# EAGLE board rpiSensors (EAGLE 6.2)
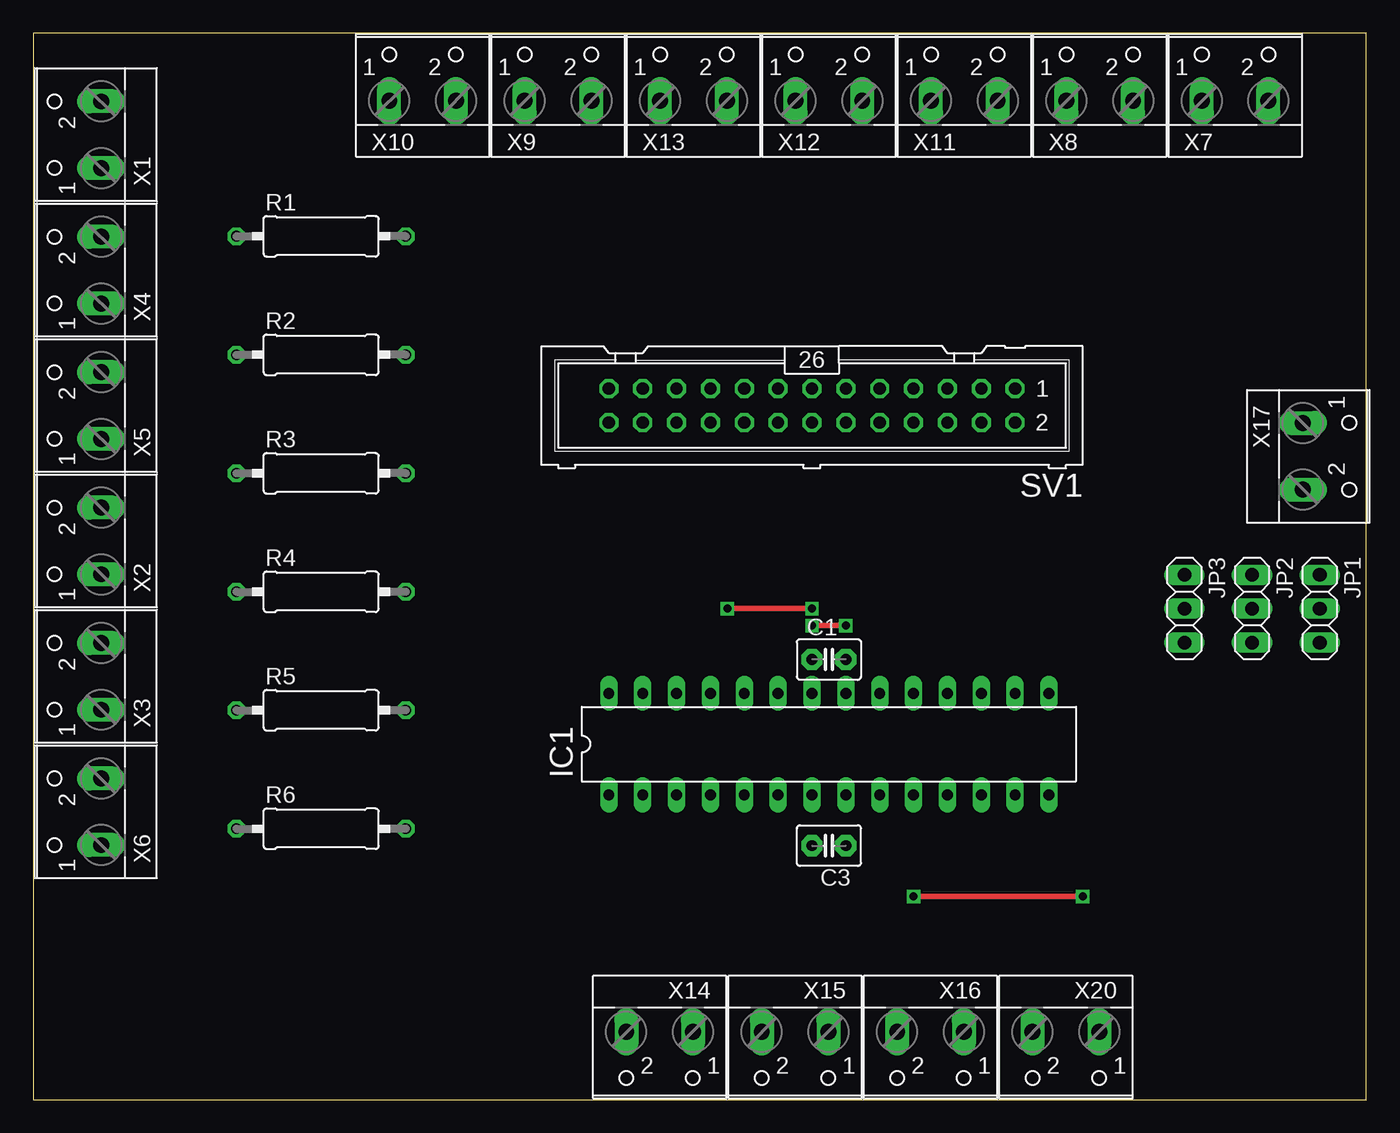
[diagram p0: board, top side]
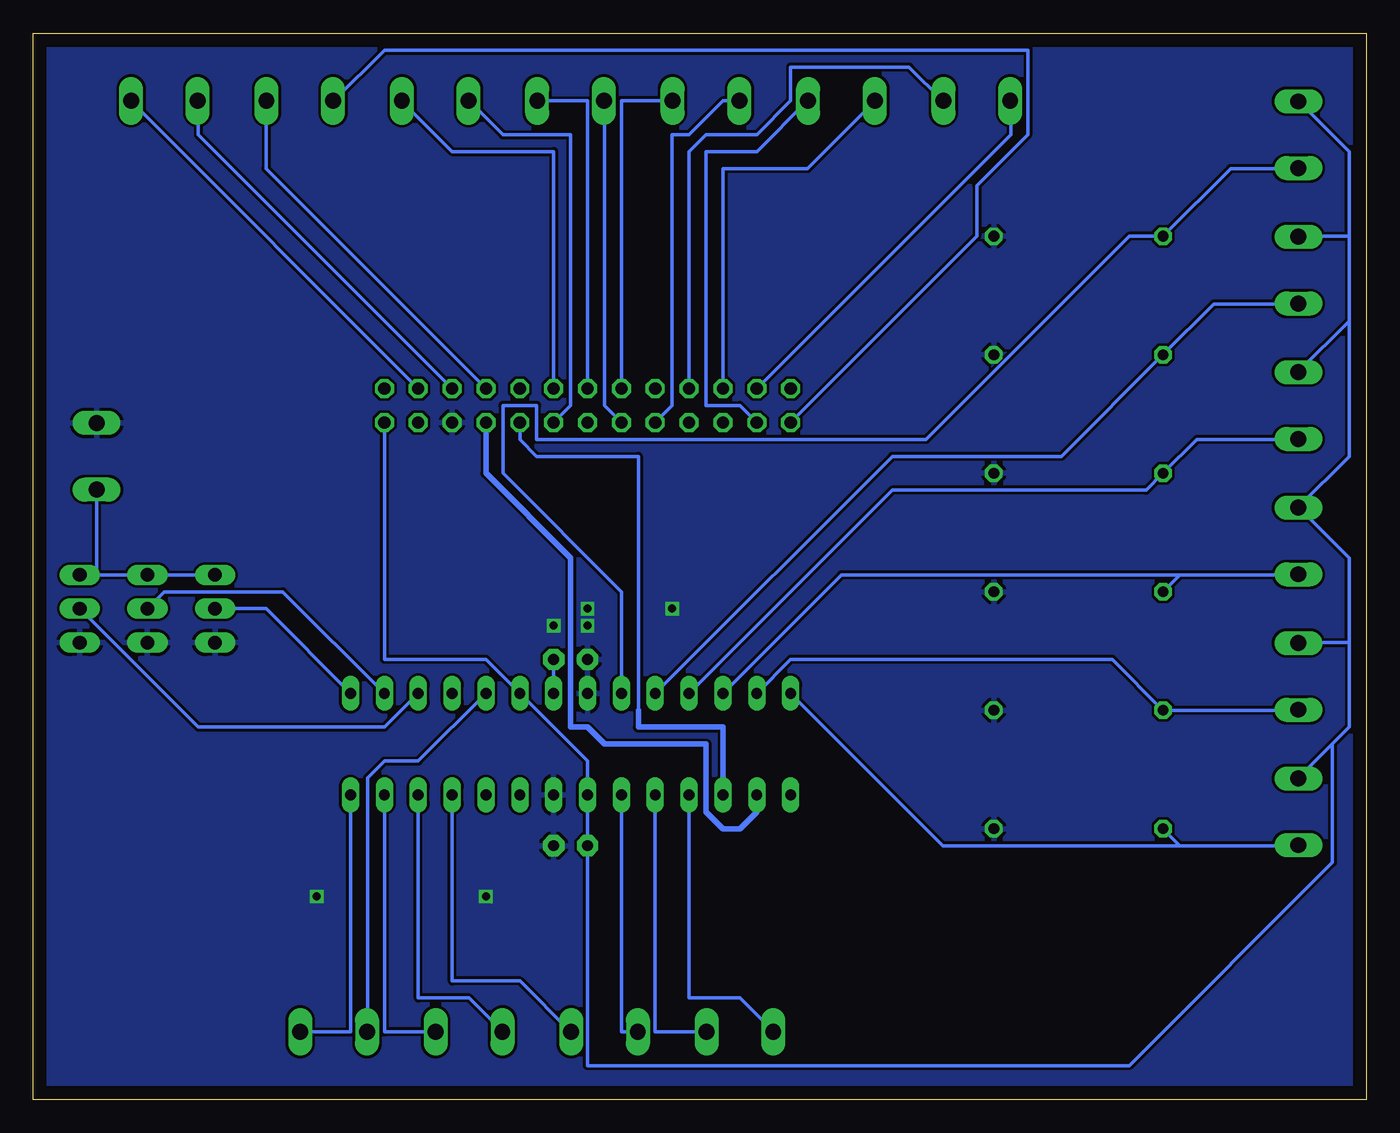
[diagram p1: board, bottom side, seen from below]

Size 100 x 80 mm. Coordinates in mm from the lower left corner, seen from the top.
Outline: 0,0 100,0 100,80 0,80 0,0
Copper layers (1*16): Top 0.035mm / dielectric 1.5mm / Bottom 0.035mm
Design rules: minimum track width 10mil, minimum drill 24mil, track to track 8mil, track to pad 8mil, pad to pad 8mil, via to via 8mil, smd to smd 8mil, copper to edge 40mil, drill to drill 8mil, minimum pad ring 10mil, minimum via ring 8mil, stop-mask expansion 4mil, vias tented up to drill 0mil, thermal gap 10mil

## Footprints (pad centres in the part's own frame; a part is rotated, then mirrored left to right if it is on the bottom)
C2.5-3 = drill 0.813 pad 1.6 octagon: 1 -1.27,0; 2 1.27,0
DIL28-3 = drill 0.813 long: 1 -16.51,-3.81; 2 -13.97,-3.81; 3 -11.43,-3.81; 4 -8.89,-3.81; 5 -6.35,-3.81; 6 -3.81,-3.81; 7 -1.27,-3.81; 8 1.27,-3.81; 9 3.81,-3.81; 10 6.35,-3.81; 11 8.89,-3.81; 12 11.43,-3.81; 13 13.97,-3.81; 14 16.51,-3.81; 15 16.51,3.81; 16 13.97,3.81; 17 11.43,3.81; 18 8.89,3.81; 19 6.35,3.81; 20 3.81,3.81; 21 1.27,3.81; 22 -1.27,3.81; 23 -3.81,3.81; 24 -6.35,3.81; 25 -8.89,3.81; 26 -11.43,3.81; 27 -13.97,3.81; 28 -16.51,3.81
1X03 = drill 1.016 long: 1 -2.54,0; 2 0,0; 3 2.54,0
0309/12 = drill 0.813 octagon: 1 -6.35,0; 2 6.35,0
ML26 = drill 0.914 octagon: 1 -15.24,-1.27; 2 -15.24,1.27; 3 -12.7,-1.27; 4 -12.7,1.27; 5 -10.16,-1.27; 6 -10.16,1.27; 7 -7.62,-1.27; 8 -7.62,1.27; 9 -5.08,-1.27; 10 -5.08,1.27; 11 -2.54,-1.27; 12 -2.54,1.27; 13 0,-1.27; 14 0,1.27; 15 2.54,-1.27; 16 2.54,1.27; 17 5.08,-1.27; 18 5.08,1.27; 19 7.62,-1.27; 20 7.62,1.27; 21 10.16,-1.27; 22 10.16,1.27; 23 12.7,-1.27; 24 12.7,1.27; 25 15.24,-1.27; 26 15.24,1.27
W237-102 = drill 1.194 long: 1 -2.5,-1.27; 2 2.5,-1.27

## Placement (x,y rotation side)
C1  100n  [C2.5-3]  59.69,33.02 0 top
C3  100n  [C2.5-3]  59.69,19.05 180 top
IC1  MEGA8-P  [DIL28-3]  59.69,26.67 0 top
JP1  [1X03]  96.52,36.83 270 top
JP2  [1X03]  91.44,36.83 270 top
JP3  [1X03]  86.36,36.83 270 top
R1  [0309/12]  21.59,64.77 0 top
R2  [0309/12]  21.59,55.88 0 top
R3  [0309/12]  21.59,46.99 0 top
R4  [0309/12]  21.59,38.1 0 top
R5  [0309/12]  21.59,29.21 0 top
R6  [0309/12]  21.59,20.32 0 top
SV1  [ML26]  58.42,52.07 180 top
X1  [W237-102]  3.81,72.39 90 top
X2  [W237-102]  3.81,41.91 90 top
X3  [W237-102]  3.81,31.75 90 top
X4  [W237-102]  3.81,62.23 90 top
X5  [W237-102]  3.81,52.07 90 top
X6  [W237-102]  3.81,21.59 90 top
X7  [W237-102]  90.17,76.2 0 top
X8  [W237-102]  80.01,76.2 0 top
X9  [W237-102]  39.37,76.2 0 top
X10  [W237-102]  29.21,76.2 0 top
X11  [W237-102]  69.85,76.2 0 top
X12  [W237-102]  59.69,76.2 0 top
X13  [W237-102]  49.53,76.2 0 top
X14  [W237-102]  46.99,3.81 180 top
X15  [W237-102]  57.15,3.81 180 top
X16  [W237-102]  67.31,3.81 180 top
X17  [W237-102]  96.52,48.26 270 top
X20  [W237-102]  77.47,3.81 180 top

## Library data of the parts
C1 C3 = capacitor-wima
IC1 = atmel; OC_FARNELL: unknown; OC_NEWARK: unknown
JP1-JP3 = pinhead
R1-R6 = resistor
SV1 = con-harting-ml; OC_FARNELL: unknown; OC_NEWARK: unknown
X1-X17 X20 = con-wago-500; MPN: 237-102; OC_FARNELL: unknown; OC_NEWARK: 70K9898

## Nets
+5V: C3.2 IC1.7 IC1.20 SV1.2 X1.2 X2.2 X3.2 X4.2 X5.2 X6.2
GND: C1.1 C3.1 IC1.8 IC1.22 JP1.3 JP2.3 JP3.3 R1.2 R2.2 R3.2 R4.2 R5.2 R6.2 SV1.6 X17.1
N$1: IC1.2 SV1.8
N$2: IC1.3 SV1.10
N$3: IC1.23 R1.1 X1.1
N$4: IC1.24 R2.1 X4.1
N$5: IC1.27 R5.1 X3.1
N$6: IC1.25 R3.1 X5.1
N$7: IC1.26 R4.1 X2.1
N$8: IC1.28 R6.1 X6.1
N$9: SV1.3 X7.2
N$10: SV1.5 X7.1
N$11: SV1.7 X8.2
N$12: SV1.26 X8.1
N$13: SV1.24 X9.2
N$14: SV1.21 X9.1
N$15: SV1.19 X10.2
N$16: SV1.23 X10.1
N$17: SV1.11 X11.2
N$18: SV1.12 X11.1
N$19: SV1.13 X12.2
N$20: SV1.15 X13.2
N$21: SV1.16 X12.1
N$22: SV1.18 X13.1
N$23: IC1.17 JP1.2
N$24: IC1.16 JP2.2
N$25: IC1.15 JP3.2
N$27: IC1.19 X20.2
N$28: IC1.14 X20.1
N$29: IC1.4 X14.2
N$30: IC1.5 X14.1
N$31: IC1.6 X15.2
N$32: IC1.11 X15.1
N$33: IC1.12 X16.2
N$34: IC1.13 X16.1
N$35: C1.2 IC1.21
N$36: JP1.1 JP2.1 JP3.1 X17.2

## Tracks (layer width: path | path; a pad name or v marks a point on that pad's centre or on a via)
+5V
  Bottom 0.254: SV1.2 73.66,33.02 66.04,33.02 IC1.20 58.42,25.4 IC1.7 C3.2 58.42,2.54 17.78,2.54 2.54,17.78 2.54,26.67 | 2.54,26.67 1.27,27.94 1.27,34.29 | 2.54,26.67 5.08,24.13 X6.2 | 1.27,34.29 5.08,34.29 X3.2 | 5.08,44.45 1.27,40.64 1.27,34.29 | 1.27,58.42 5.08,54.61 X5.2 | 1.27,64.77 1.27,58.42 | 1.27,64.77 5.08,64.77 X4.2 | 1.27,64.77 1.27,71.12 5.08,74.93 X1.2 | 5.08,44.45 1.27,48.26 1.27,58.42 | 5.08,44.45 X2.2
GND  (via drill 0.6)
  Top 0.406: v66.04,15.24 v78.74,15.24 | v52.07,36.83 v58.42,36.83 | v58.42,35.56 v60.96,35.56
  Bottom 0.254: IC1.22 | IC1.22
  pour Bottom: 0,80.01 100.33,80.01 100.33,0 0,0
N$1
  Bottom 0.406: SV1.8 66.04,46.99 59.69,40.64 59.69,27.94 58.42,27.94 57.15,26.67 49.53,26.67 49.53,21.59 48.26,20.32 46.99,20.32 45.72,21.59 IC1.2
N$2
  Bottom 0.254: 54.61,29.21 54.61,48.26 62.23,48.26 63.5,49.53 SV1.10
  Bottom 0.406: 54.61,29.21 54.61,27.94 48.26,27.94 IC1.3
N$3
  Bottom 0.254: X1.1 5.08,69.85 10.16,69.85 R1.1 17.78,64.77 33.02,49.53 62.23,49.53 62.23,52.07 64.77,52.07 64.77,46.99 55.88,38.1 IC1.23
N$4
  Bottom 0.254: X4.1 5.08,59.69 11.43,59.69 R2.1 22.86,48.26 35.56,48.26 IC1.24
N$5
  Bottom 0.254: X3.1 5.08,29.21 R5.1 19.05,33.02 43.18,33.02 IC1.27
N$6
  Bottom 0.254: X5.1 5.08,49.53 12.7,49.53 R3.1 16.51,45.72 35.56,45.72 IC1.25
N$7
  Bottom 0.254: 13.97,39.37 R4.1 | 13.97,39.37 5.08,39.37 X2.1 | IC1.26 39.37,39.37 13.97,39.37
N$8
  Bottom 0.254: 13.97,19.05 R6.1 | 13.97,19.05 5.08,19.05 X6.1 | IC1.28 31.75,19.05 13.97,19.05
N$9
  Bottom 0.254: SV1.3 92.71,74.93 X7.2
N$10
  Bottom 0.254: SV1.5 87.63,72.39 87.63,74.93 X7.1
N$11
  Bottom 0.254: SV1.7 82.55,69.85 82.55,74.93 X8.2
N$12
  Bottom 0.254: SV1.26 29.21,64.77 29.21,68.58 25.4,72.39 25.4,78.74 73.66,78.74 77.47,74.93 X8.1
N$13
  Bottom 0.254: SV1.24 46.99,52.07 49.53,52.07 49.53,71.12 45.72,71.12 41.91,74.93 X9.2
N$14
  Bottom 0.254: SV1.21 48.26,69.85 41.91,69.85 36.83,74.93 X9.1
N$15
  Bottom 0.254: SV1.19 50.8,71.12 49.53,72.39 45.72,72.39 43.18,74.93 43.18,77.47 34.29,77.47 31.75,74.93 X10.2
N$16
  Bottom 0.254: SV1.23 26.67,72.39 26.67,74.93 X10.1
N$17
  Bottom 0.254: SV1.11 60.96,71.12 68.58,71.12 72.39,74.93 X11.2
N$18
  Bottom 0.254: SV1.12 59.69,52.07 59.69,72.39 64.77,72.39 67.31,74.93 X11.1
N$19
  Bottom 0.254: SV1.13 58.42,74.93 X12.2 62.23,74.93
N$20
  Bottom 0.254: SV1.15 55.88,74.93 X13.2
N$21
  Bottom 0.254: SV1.16 57.15,52.07 57.15,74.93 X12.1
N$22
  Bottom 0.254: SV1.18 52.07,52.07 52.07,72.39 50.8,72.39 48.26,74.93 X13.1 46.99,74.93
N$23
  Bottom 0.254: IC1.17 73.66,27.94 87.63,27.94 JP1.2
N$24
  Bottom 0.254: IC1.16 81.28,38.1 90.17,38.1 JP2.2
N$25
  Bottom 0.254: IC1.15 82.55,36.83 JP3.2
N$27
  Bottom 0.254: IC1.19 71.12,25.4 73.66,25.4 74.93,24.13 74.93,5.08 X20.2
N$28
  Bottom 0.254: IC1.14 76.2,5.08 X20.1 80.01,5.08
N$29
  Bottom 0.254: IC1.4 50.8,7.62 46.99,7.62 44.45,5.08 X14.2
N$30
  Bottom 0.254: IC1.5 53.34,5.08 X14.1
N$31
  Bottom 0.254: IC1.6 55.88,5.08 X15.2 54.61,5.08
N$32
  Bottom 0.254: IC1.11 68.58,8.89 63.5,8.89 59.69,5.08 X15.1
N$33
  Bottom 0.254: IC1.12 71.12,7.62 67.31,7.62 64.77,5.08 X16.2
N$34
  Bottom 0.254: IC1.13 73.66,5.08 X16.1
N$35
  Bottom 0.254: C1.2 IC1.21
N$36
  Bottom 0.254: JP3.1 JP2.1 95.25,39.37 | 95.25,39.37 X17.2 | 95.25,39.37 JP1.1